# Altium PCB Base.PcbDoc (part 1 of 2)
Units mm, origin at the board's own origin, x right, y up, seen from the top; angles counter-clockwise.
Board outline 100 x 100 mm, 4 copper layers (Top Layer, Layer 1, Layer 2, Bottom Layer), stack 1.56 mm thick; 130 components, 105 nets, 399 pads, 222 vias.
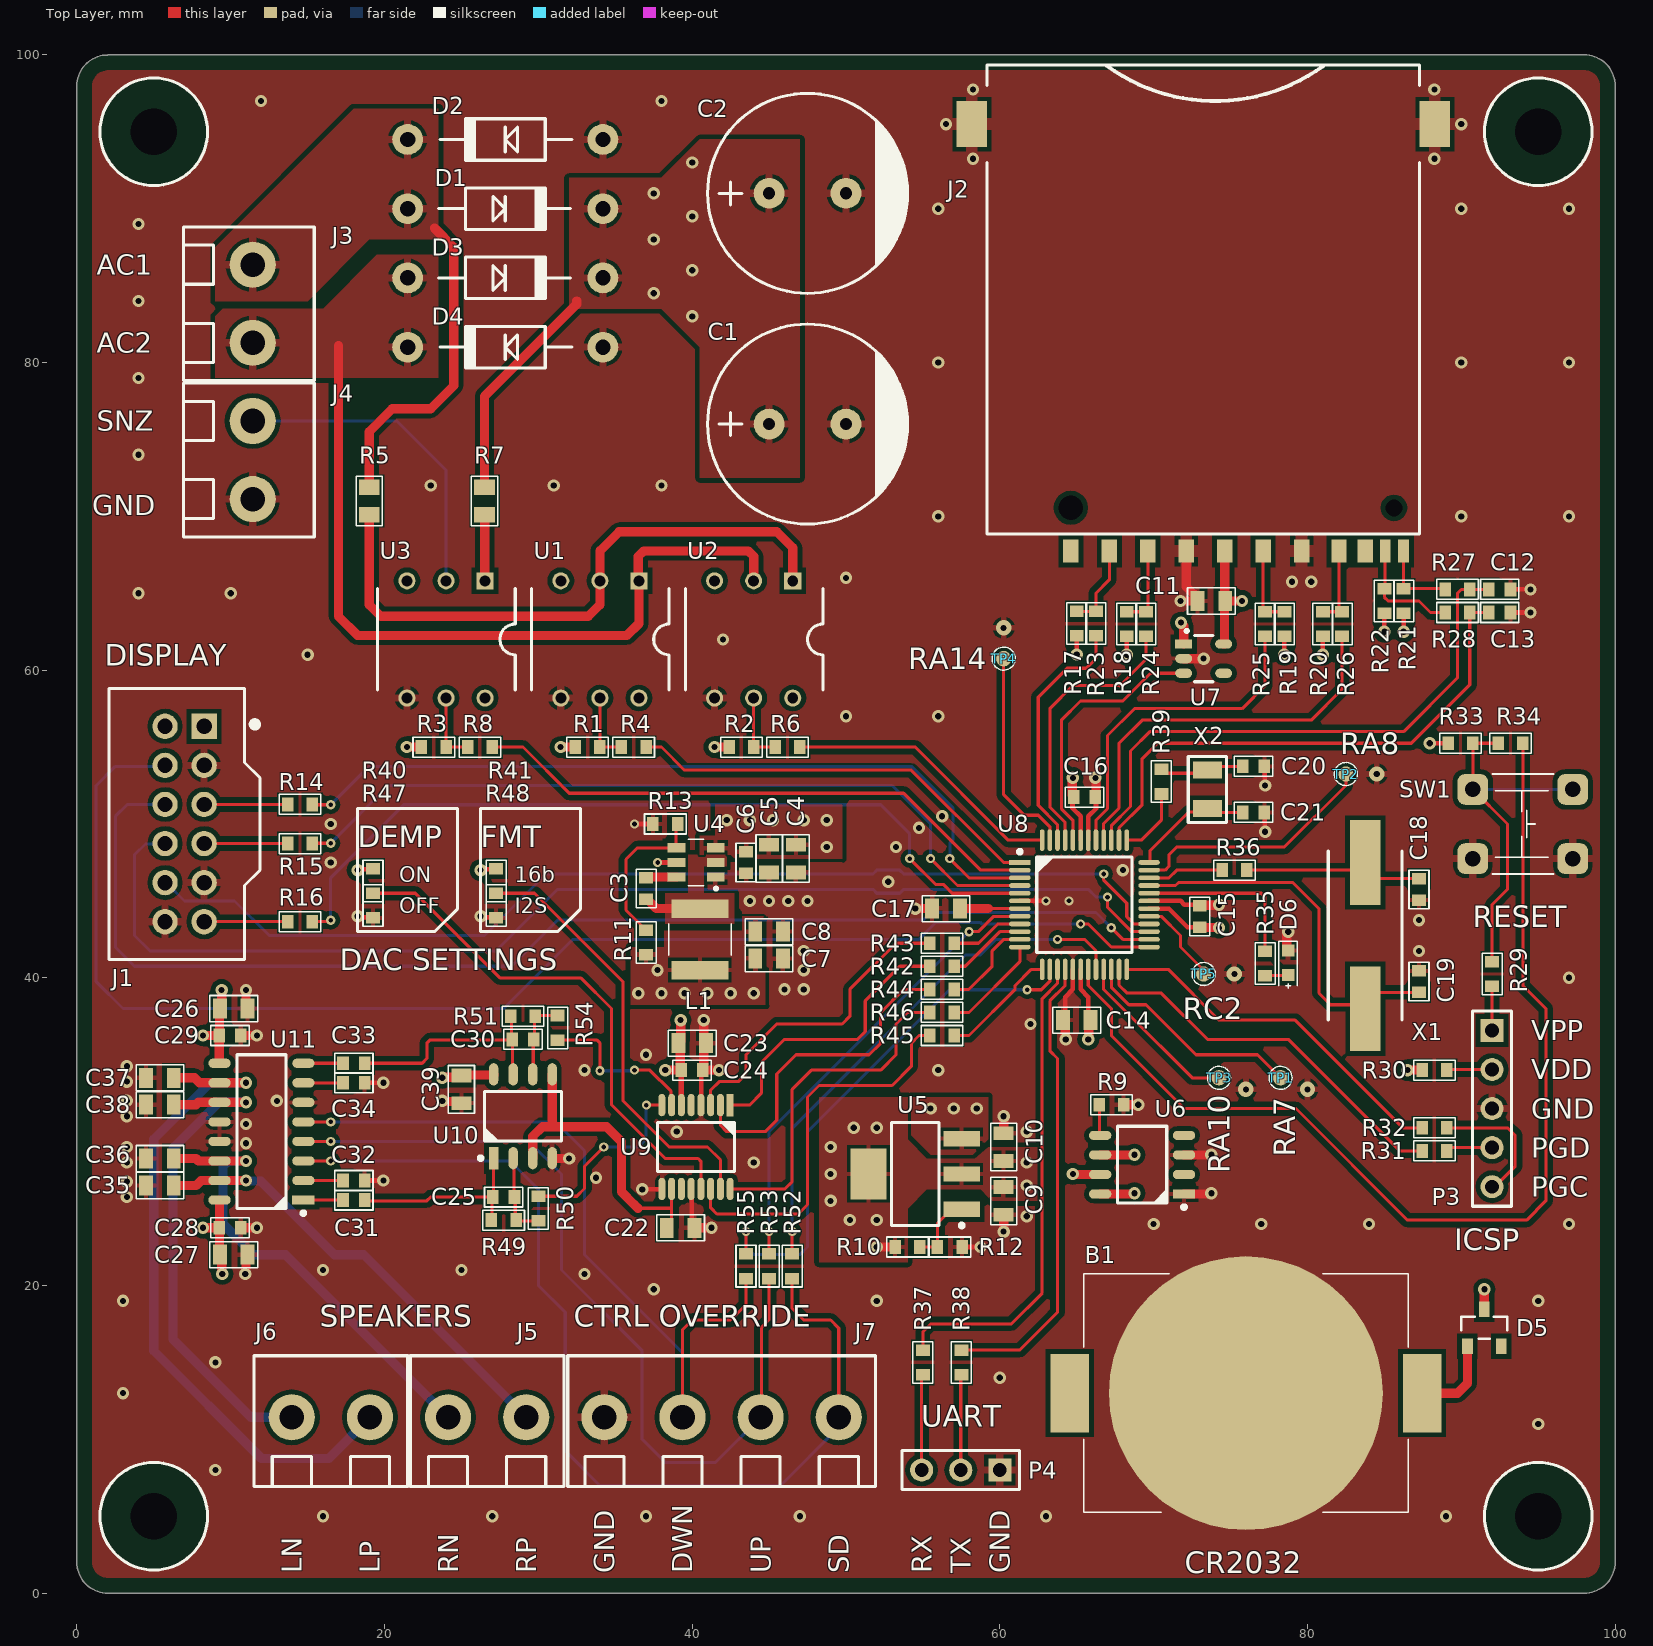
[diagram p0: Top Layer view]
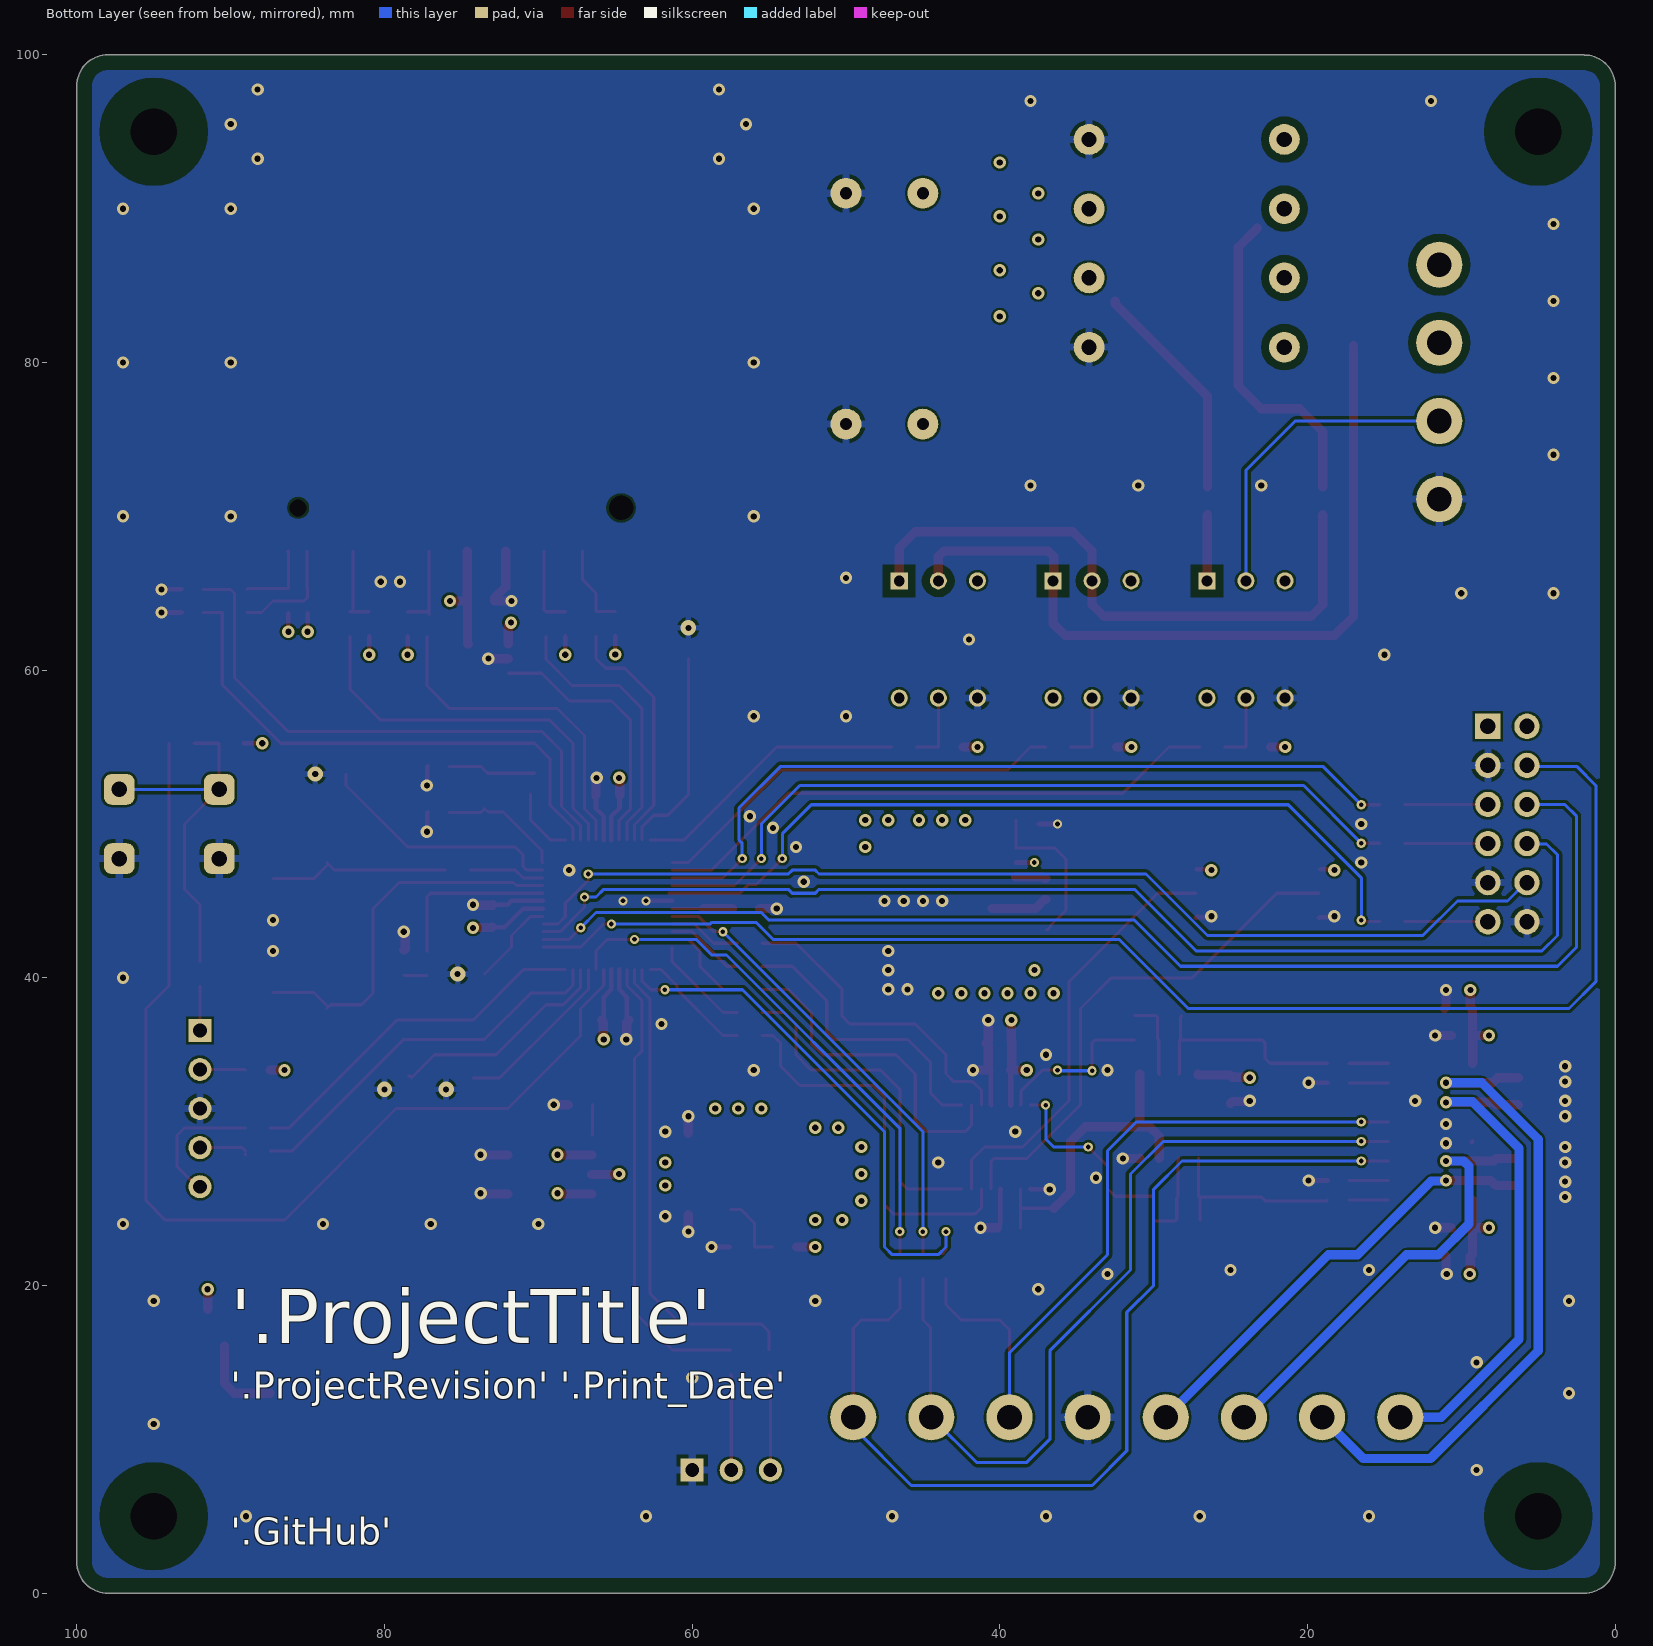
[diagram p1: Bottom Layer view, seen from below]
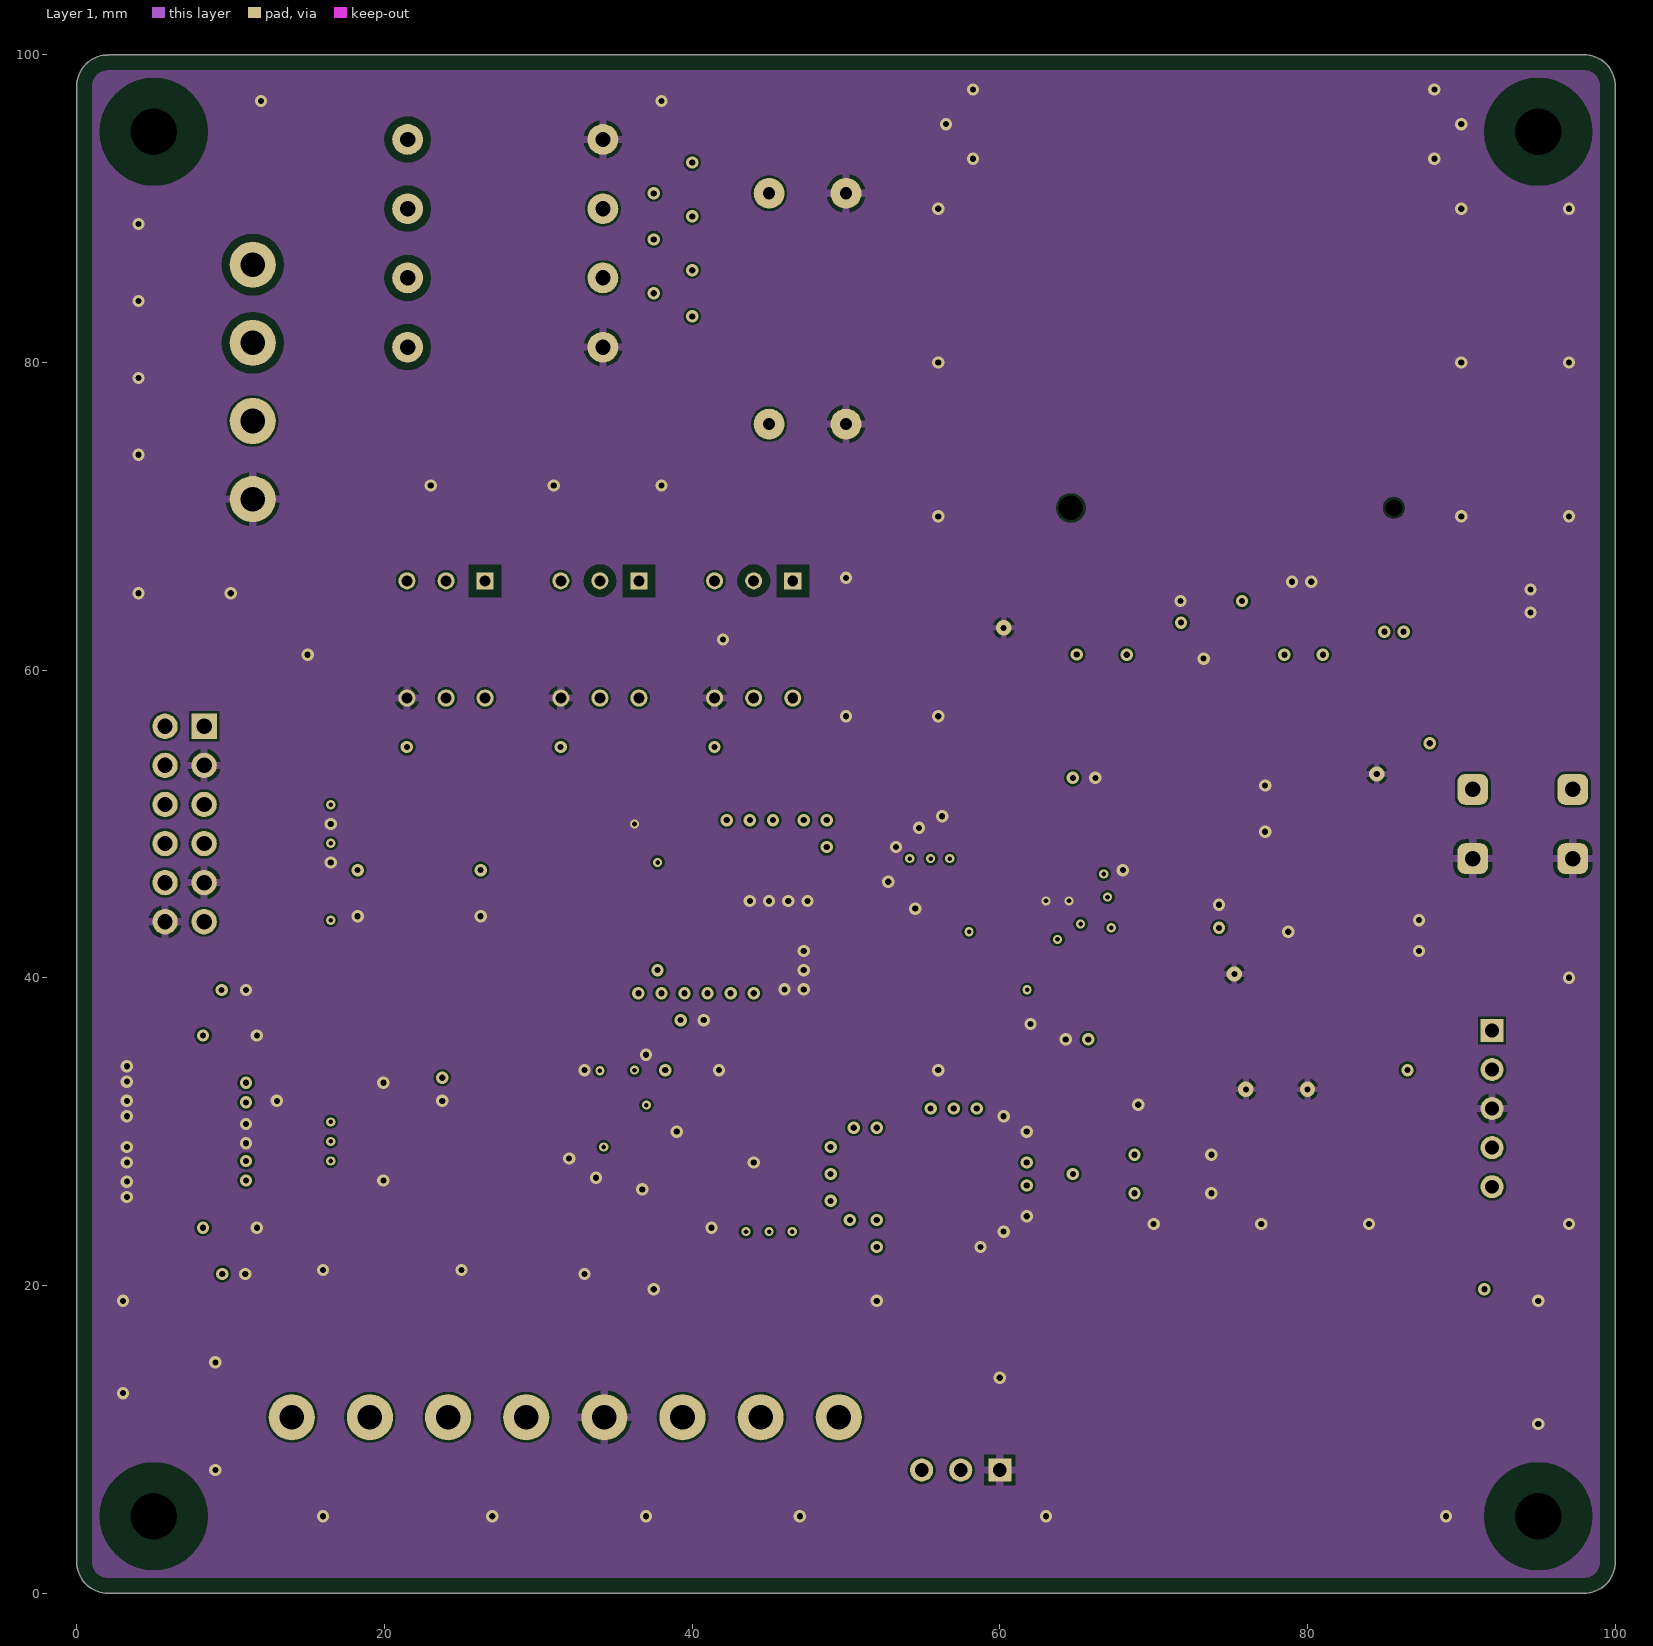
[diagram p2: Layer 1]
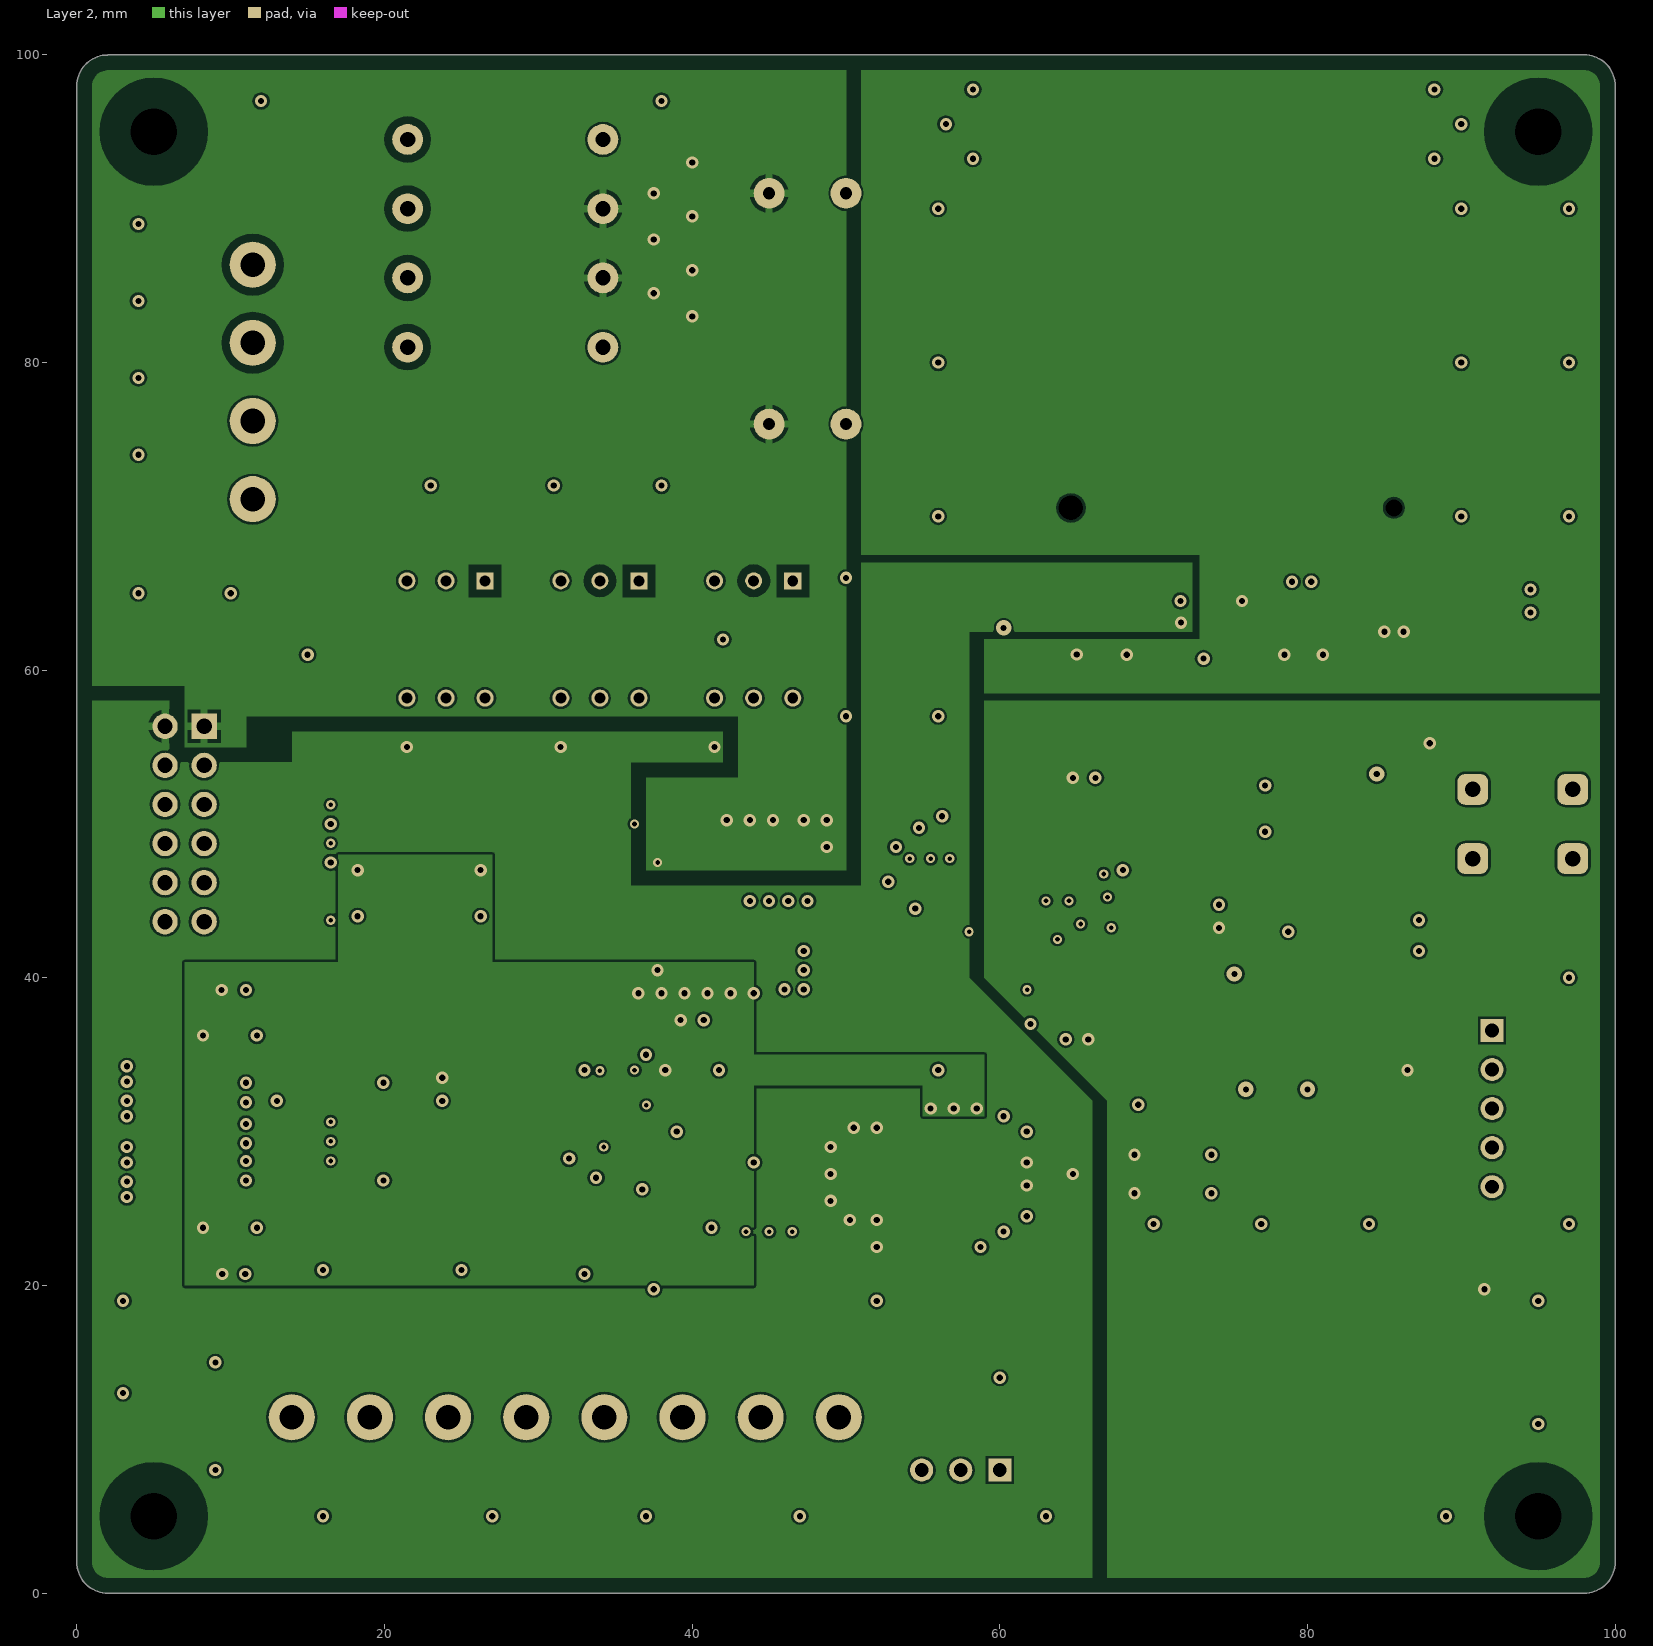
[diagram p3: Layer 2]
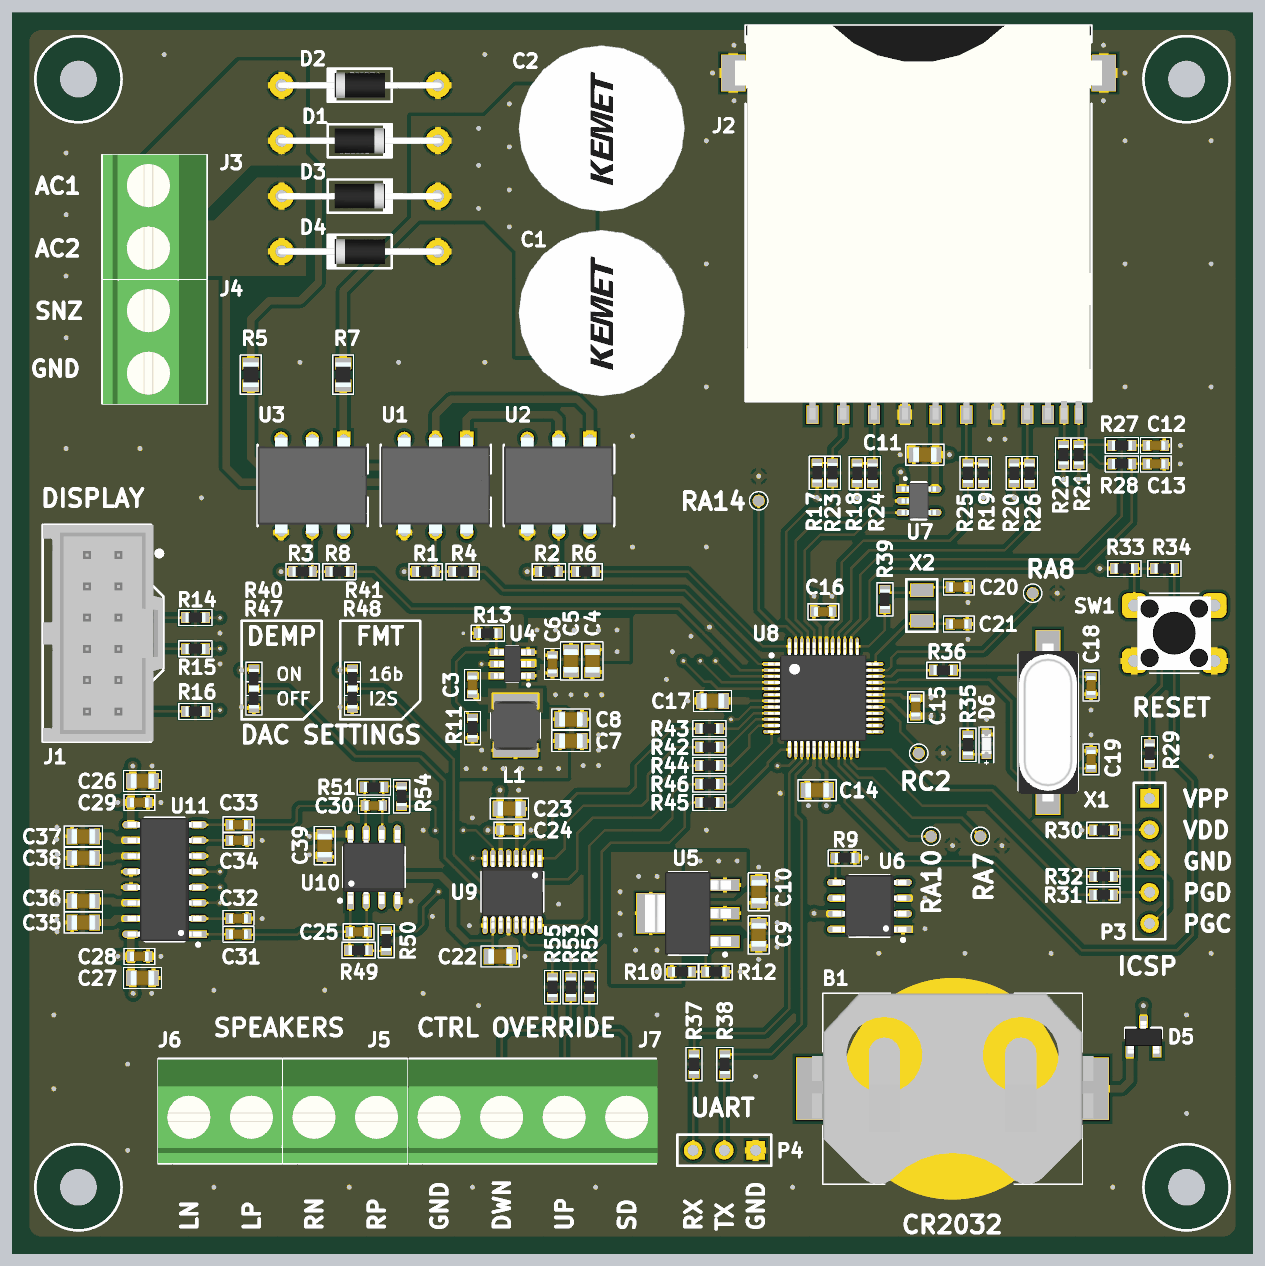
[diagram p5: 3D render of the assembled board from above, using the file's embedded part models]

## Layer stack, top to bottom
Top Solder: solder mask 0.0102, Solder Resist, Dk 3.5
Top Layer: signal copper 0.035
Dielectric 2: prepreg 0.11, PP-006, Dk 4.1
Layer 1: signal copper 0.035
Dielectric 1: dielectric 1.2, FR-4, Dk 4.8
Layer 2: signal copper 0.035
Dielectric 3: prepreg 0.11, PP-006, Dk 4.1
Bottom Layer: signal copper 0.035
Bottom Solder: solder mask 0.0102, Solder Resist, Dk 3.5

## Board outline
0,2 0,97.99 cw(c2,97.99) 2,99.99 2,100 98,100 cw(c98,98) 100,98 100,2 cw(c98,2) 98,0 2,0 cw(c2,2)

## Design rules (kind name [scope] priority, off if disabled: settings)
BoardOutlineClearance [All] p1: gap=0.254 ignorepadtopadclearanceinfootprint=FALSE except(0: Arc-SplitContinuation Track-SplitContinuation SMDPad-SplitContinuation THPad-SplitContinuation Via-SplitContinuation Fill-SplitContinuation Region-SplitContinuation Text-SplitContinuation; 1: Poly-OutlineEdge Poly-CavityEdge Poly-CutoutEdge Poly-SplitBarrior Poly-SplitContinuation)
Clearance "MOUNTING HOLES" [(InNamedUnion('Mounting Holes'))] p1: gap=2 ignorepadtopadclearanceinfootprint=FALSE
Clearance "POLY GND TOP" [(InNamedPolygon('GND Top'))] p2: gap=0.152 ignorepadtopadclearanceinfootprint=FALSE except(0.3: Arc-Fill Arc-Poly Arc-Region Track-Fill Track-Poly Track-Region SMDPad-Fill SMDPad-Poly SMDPad-Region THPad-Fill THPad-Poly THPad-Region Via-Fill Via-Poly Via-Region Fill-Fill Fill-Poly Fill-Region Poly-Poly Poly-Region Region-Region)
Clearance AC [InNet('AC1') or InNet('AC2') or InNet('NetR5_1') or InNet('NetR7_1')] p3: gap=0.5 ignorepadtopadclearanceinfootprint=FALSE
Clearance [All] p4: gap=0.152 ignorepadtopadclearanceinfootprint=FALSE
ComponentClearance [All] p1 off: gap=0.254 collisioncheckmode=3 verticalgap=0 showdistances=FALSE
Height [All] p1: minheight=0 maxheight=50 prefheight=12.7
HoleSize [All] p1: absolutevalues=TRUE maxlimit=6.5 minlimit=0.2 maxpercent=80.000 minpercent=20.000
HoleToHoleClearance [All] p1: gap=0.406 allowstackedmicrovias=TRUE
MinimumSolderMaskSliver [All] p1: minsoldermaskwidth=0.1
PasteMaskExpansion [All] p1: expansion=-0.05
PlaneClearance PlaneClearance_TOP [All] p1: clearance=1
PlaneClearance [All] p2: clearance=0.508
PlaneConnect [All] p1: planeconnectstyle=Direct reliefexpansion=0.508 reliefentries=4 reliefconductorwidth=0.254 reliefairgap=0.254
PolygonConnect PolygonConnect_CR2032 [HasFootprint('BATHLD001-CR2032')] p1: connectstyle=Direct reliefconductorwidth=0.254 reliefentries=4 polygonreliefangle="90 Angle" airgapwidth=0.254
PolygonConnect PolygonConnect_SD [HasFootprint('SD 3M SD-RSMT-2-MQ-WF') vs InNet('GND')] p2: connectstyle=Relief reliefconductorwidth=0.8 reliefentries=4 polygonreliefangle="90 Angle" airgapwidth=0.254
PolygonConnect PolygonConnect_Direct [InNet('SW')] p3: connectstyle=Direct reliefconductorwidth=0.254 reliefentries=4 polygonreliefangle="90 Angle" airgapwidth=0.254
PolygonConnect [All] p4: thpad.connectstyle=Relief thpad.reliefconductorwidth=0.5 thpad.reliefentries=4 thpad.polygonreliefangle="90 Angle" thpad.airgapwidth=0.254 smdpad.connectstyle=Relief smdpad.reliefconductorwidth=0.3 smdpad.reliefentries=4 smdpad.polygonreliefangle="90 Angle" smdpad.airgapwidth=0.2 via.connectstyle=Direct via.reliefconductorwidth=0.254 via.reliefentries=4 via.polygonreliefangle="90 Angle" via.airgapwidth=0.254
RoutingVias [All] p1: holewidth=0.3 width=0.6 viastyle="Through Hole" minholewidth=0.2 minwidth=0.4 maxholewidth=2 maxwidth=6
SilkToSilkClearance [All] p1: silktosilkclearance=0
SilkToSolderMaskClearance [IsPad] p1: minsilkscreentomaskgap=0.01 clearancetoexposedcopper=TRUE
SolderMaskExpansion [All] p1: expansion=0.1 istentingtop=FALSE
Width [All] p1: maxlimit=1.27 minlimit=0.152 preferedwidth=0.254
20 further rules are at their usual default settings.

## Components (designator, comment, footprint, x,y, rotation, side; value= is the part's Value field where it differs from the comment)
B1 "BAT-HLD-001" BATHLD001-CR2032 76,13 r0 top locked
C1 "ESK228M025AL4AA" CAPPRD500W60D1300H2700 45,76 r0 top locked value=2200u
C2 "ESK228M025AL4AA" CAPPRD500W60D1300H2700 45,91 r0 top locked value=2200u
C3 "C0603C104M4RAC" CAP-0603 37,45.8 r90 top value=100n
C4 "CL21A106KAYNNN" CAP-0805 46.75,47.75 r270 top value=10u
C5 "CL21A106KAYNNN" CAP-0805 45,47.75 r270 top value=10u
C6 "C0603C104M4RAC" CAP-0603 43.5,47.5 r270 top value=100n
C7 "CL21A106KAYNNN" CAP-0805 45,41.25 r0 top value=10u
C8 "CL21A106KAYNNN" CAP-0805 45,43 r0 top value=10u
C9 "CL21A106KAYNNN" CAP-0805 60.25,25.5 r270 top value=10u
C10 "CL21A106KAYNNN" CAP-0805 60.25,29 r90 top value=10u
C11 "CL21A106KAYNNN" CAP-0805 73.75,64.5 r180 top value=10u
C12 "C0603C104M4RAC" CAP-0603 92.5,65.25 r180 top value=100n
C13 "C0603C104M4RAC" CAP-0603 92.5,63.75 r180 top value=100n
C14 "CL21A106KAYNNN" CAP-0805 65,37.25 r180 top value=10u
C15 "C0603C104M4RAC" CAP-0603 73,44 r270 top value=100n
C16 "C0603C104M4RAC" CAP-0603 65.5,51.75 r180 top value=100n
C17 "CL21A106KAYNNN" CAP-0805 56.5,44.5 r180 top value=10u
C18 "C0603C270J5GACTU" CAP-0603 87.25,45.75 r270 top value=27p
C19 "C0603C270J5GACTU" CAP-0603 87.25,39.75 r90 top value=27p
C20 "CC0603JRNPO9BN8R2" CAP-0603 76.5,53.75 r0 top value=8.2p
C21 "CC0603JRNPO9BN8R2" CAP-0603 76.5,50.75 r0 top value=8.2p
C22 "CL21A106KAYNNN" CAP-0805 39.25,23.75 r0 top value=10u
C23 "CL21A106KAYNNN" CAP-0805 40,35.75 r0 top value=10u
C24 "C0603C104M4RAC" CAP-0603 40,34 r180 top value=100n
C25 "GRM1885C1H152JA01J" CAP-0603 27.75,25.75 r180 top value=1n5
C26 "CL21A106KAYNNN" CAP-0805 10.2,38 r0 top value=10u
C27 "CL21A106KAYNNN" CAP-0805 10.2,22 r0 top value=10u
C28 "C0603C104M4RAC" CAP-0603 9.95,23.75 r180 top value=100n
C29 "C0603C104M4RAC" CAP-0603 9.95,36.25 r180 top value=100n
C30 "GRM1885C1H152JA01J" CAP-0603 29,36 r180 top value=1n5
C31 "C0603C104M4RAC" CAP-0603 18,25.555 r180 top value=100n
C32 "C0603C104M4RAC" CAP-0603 18,26.825 r180 top value=100n
C33 "C0603C104M4RAC" CAP-0603 18,34.445 r180 top value=100n
C34 "C0603C104M4RAC" CAP-0603 18,33.175 r180 top value=100n
C35 "885012007083" CAP-0805 5.4,26.5 r0 top value=150p
C36 "885012007083" CAP-0805 5.4,28.25 r0 top value=150p
C37 "885012007083" CAP-0805 5.4,33.5 r0 top value=150p
C38 "885012007083" CAP-0805 5.4,31.75 r0 top value=150p
C39 "CL21A106KAYNNN" CAP-0805 25,32.75 r270 top value=10u
D1 "1N4004" DIODE-DO41 27.85,90 r0 top
D2 "1N4004" DIODE-DO41 27.85,94.5 r180 top
D3 "1N4004" DIODE-DO41 27.85,85.5 r0 top
D4 "1N4004" DIODE-DO41 27.85,81 r180 top
D5 "BAS20LT3G" SOT95P240X110-3N 91.5,17.25 r90 top
D6 "150060VS75000" LED-SMD-0603-1.6X0.8 78.748,40.977 r270 top value=Green
J1 "90130-1112" SHDR12W65P254_2X6_1758X975X1110P 7,50 r270 top locked
J2 "SD-RSMT-2-MQ-WF" "SD 3M SD-RSMT-2-MQ-WF" 74,94 r180 top locked
J3 "SCREW-TH-BLOCK-200-2" SCREW-TH-BLOCK-200-2 11.43,83.82 r270 top locked
J4 "SCREW-TH-BLOCK-200-2" SCREW-TH-BLOCK-200-2 11.43,73.66 r270 top locked
J5 "SCREW-TH-BLOCK-200-2" SCREW-TH-BLOCK-200-2 26.67,11.43 r0 top locked
J6 "SCREW-TH-BLOCK-200-2" SCREW-TH-BLOCK-200-2 16.51,11.43 r0 top locked
J7 "SCREW-TH-BLOCK-200-4" SCREW-TH-BLOCK-200-4 41.91,11.43 r0 top locked
L1 "NRS4018T3R3MDGJ" INDP4040X18M 40.5,42.5 r270 top value=3u3
P3 "ICSP" HDR1X5 92,36.58 r270 top
P4 "UART" HDR1X3 60,8 r180 top locked
R1 "RC0603FR-074K7L" RES-0603 33.2,55 r180 top value=4K7
R2 "RC0603FR-074K7L" RES-0603 43.2,55 r180 top value=4K7
R3 "RC0603FR-074K7L" RES-0603 23.2,55 r180 top value=4K7
R4 "RC0603FR-074K7L" RES-0603 36.2,55 r180 top value=4K7
R5 "RC0805FR-071KL" RES-0805 19,71 r90 top value=1K
R6 "RC0603FR-074K7L" RES-0603 46.2,55 r180 top value=4K7
R7 "RC0805FR-071KL" RES-0805 26.5,71 r90 top value=1K
R8 "RC0603FR-074K7L" RES-0603 26.2,55 r180 top value=4K7
R9 "RC0603FR-07470RL" RES-0603 67.25,31.75 r0 top value=470R
R10 "RC0603FR-071KL" RES-0603 53.996,22.5 r180 top value=1K
R11 "RC0603FR-0754K9L" RES-0603 37,42.3 r270 top value=54K9
R12 "RC0603FR-071K6L" RES-0603 56.746,22.5 r180 top value=1K6
R13 "RC0603FR-0710KL" RES-0603 38.25,50 r0 top value=10K
R14 "RC0603FR-07100RL" RES-0603 14.5,51.27 r180 top value=100R
R15 "RC0603FR-07100RL" RES-0603 14.5,48.73 r180 top value=100R
R16 "RC0603FR-07100RL" RES-0603 14.5,43.65 r180 top value=100R
R17 "RC0603FR-0747KL" RES-0603 65,63.025 r270 top value=47K
R18 "RC0603FR-0747KL" RES-0603 68.25,63 r270 top value=47K
R19 "RC0603FR-0747KL" RES-0603 78.5,63 r270 top value=47K
R20 "RC0603FR-0747KL" RES-0603 81,63 r270 top value=47K
R21 "RC0603FR-0747KL" RES-0603 86.25,64.5 r270 top value=47K
R22 "RC0603FR-0747KL" RES-0603 85,64.5 r270 top value=47K
R23 "RC0603FR-07100RL" RES-0603 66.25,63.025 r90 top value=100R
R24 "RC0603FR-07100RL" RES-0603 69.5,63 r90 top value=100R
R25 "RC0603FR-07100RL" RES-0603 77.25,63 r90 top value=100R
R26 "RC0603FR-07100RL" RES-0603 82.25,63 r90 top value=100R
R27 "RC0603FR-0747KL" RES-0603 89.75,65.25 r180 top value=47K
R28 "RC0603FR-0747KL" RES-0603 89.75,63.75 r180 top value=47K
R29 "RC0603FR-07100RL" RES-0603 92,40.25 r90 top value=100R
R30 "RC0603FR-07100RL" RES-0603 88.25,34 r180 top value=100R
R31 "RC0603FR-07100RL" RES-0603 88.25,28.75 r180 top value=100R
R32 "RC0603FR-07100RL" RES-0603 88.25,30.25 r180 top value=100R
R33 "RC0603FR-0747KL" RES-0603 89.95,55.25 r180 top value=47K
R34 "RC0603FR-07100RL" RES-0603 93.2,55.25 r0 top value=100R
R35 "RC0603FR-071KL" RES-0603 77.248,40.927 r270 top value=1K
R36 "RC0603FR-07100RL" RES-0603 75.25,47 r180 top value=100R
R37 "RC0603FR-07100RL" RES-0603 55,15 r270 top value=100R
R38 "RC0603FR-07100RL" RES-0603 57.5,15 r270 top value=100R
R39 "RC0603FR-07100RL" RES-0603 70.5,52.75 r270 top value=100R
R40 "RC0603FR-07100RL" RES-0603 19.25,46.3 r90 top value=100R
R41 "RC0603FR-07100RL" RES-0603 27.25,46.3 r90 top value=100R
R42 "RC0603FR-07100RL" RES-0603 56.25,40.75 r180 top value=100R
R43 "RC0603FR-07100RL" RES-0603 56.25,42.25 r180 top value=100R
R44 "RC0603FR-07100RL" RES-0603 56.25,39.25 r180 top value=100R
R45 "RC0603FR-07100RL" RES-0603 56.25,36.25 r180 top value=100R
R46 "RC0603FR-07100RL" RES-0603 56.25,37.75 r180 top value=100R
R47 "RC0603FR-07100RL" RES-0603 19.25,44.7 r90 top value=100R
R48 "RC0603FR-07100RL" RES-0603 27.25,44.7 r90 top value=100R
R49 "RC0603FR-074K7L" RES-0603 27.75,24.25 r180 top value=4K7
R50 "RC0603FR-0747KL" RES-0603 30,25 r90 top value=47K
R51 "RC0603FR-074K7L" RES-0603 29,37.5 r180 top value=4K7
R52 "RC0603FR-07100RL" RES-0603 46.5,21.25 r270 top value=100R
R53 "RC0603FR-07100RL" RES-0603 45,21.25 r270 top value=100R
R54 "RC0603FR-0747KL" RES-0603 31.25,36.75 r270 top value=47K
R55 "RC0603FR-07100RL" RES-0603 43.5,21.25 r270 top value=100R
SW1 "Push Button 6mm TH" "Push Button 6mm TH" 94,50 r180 top
TP1 "RA7" TESTPOINT-1mm 78.25,33.5 r0 top
TP2 "RA8" TESTPOINT-1mm 82.5,53.25 r90 top
TP3 "RA10" TESTPOINT-1mm 74.25,33.5 r90 top
TP4 "RA14" TESTPOINT-1mm 60.25,60.75 r90 top
TP5 "RC2" TESTPOINT-1mm 73.25,40.25 r90 top
U1 "H11A1" DIP762W51P254L889H508Q6N 34,62 r270 top locked
U2 "H11A1" DIP762W51P254L889H508Q6N 44,62 r270 top locked
U3 "H11A1" DIP762W51P254L889H508Q6N 24,62 r270 top locked
U4 "TPS561201DDC" SOT95P278X110-6N 40.25,47.5 r180 top
U5 "AZ1117IH-ADJTRG1" SOT230P700X180-4M 54.496,27.25 r180 top
U6 "MIC2548A-2YM" SOIC127P600X175-8N 69.25,27.85 r180 top
U7 "MIC2004-0.5" SOT23-5 73.25,60.75 r0 top
U8 "PIC24FJ64GA705-I/PT" TSQFP50P900X900X120-48N 65.5,44.75 r0 top
U9 "PCM1754" SOP64P600X175-16N 40.25,29 r270 top
U10 "LMV358IDR" SOIC127P600X175-8N 29,31 r90 top
U11 "PAM8407" SOIC127P600X175-16N 12,30 r180 top
X1 "LFXTAL017619Bulk" XTAL1140X490X430_HC49 83.75,42.75 r90 top value="7.168 MHz"
X2 "ECS-.327-6-34B-TR" "XTAL-ECS-3.2 mm x 1.5 mm" 73.5,52.25 r90 top value="32.768 KHz"

## Footprints (in the part's own frame and the unit in brackets; to place one, negate y for a bottom-side part, rotate by r counter-clockwise, add the part's x,y. Pads: shape width x height; smd on the part's side, far side on the other; paste and mask are expansions set on the pad)
BATHLD001-CR2032 [mm] "Linx CR2032 Battery Holder"
  rect 2.5x5.1 smd: 1(-11.45,0) 1(11.45,0)
  round 17.8 smd paste-10: 2(0,0)
  silkscreen extent -10.55,-7.75 10.55,7.75, body extent -11.43,-7.75 11.43,7.75, height 4.31
CAP-0603 [mm]
  rect 0.75x0.9 smd: 1(-0.7,0) 2(0.7,0)
  silkscreen extent -1.25,-0.65 1.25,0.65, body extent -0.8,-0.4 0.8,0.4, height 0.95
CAP-0805 [mm]
  rect 0.9x1.3 smd: 1(-0.9,0) 2(0.9,0)
  silkscreen extent -1.55,-0.85 1.55,0.85, body extent -1,-0.63 1,0.63, height 1.35
CAPPRD500W60D1300H2700 [mm]
  round 2 hole 0.8: 1(0,0) 2(5,0)
  silkscreen extent -4,-6.5 9,6.5, body extent -4.25,-6.75 9.25,6.75, height 27.2
DIODE-DO41 [mm]
  round 2 hole 1: A(-6.35,0) K(6.35,0)
  silkscreen extent -4.35,-1.35 4.25,1.35, body extent -6.7,-1.02 6.7,1.02, height 3.03
DIP762W51P254L889H508Q6N [mm]
  rect 1.11x1.11 hole 0.71: 1(-3.81,2.54)
  round 1.11 hole 0.71: 2(-3.81,0) 3(-3.81,-2.54) 4(3.81,-2.54) 5(3.81,0) 6(3.81,2.54)
  silkscreen extent -3.3,-4.45 3.3,4.5, body extent -3.94,-4.45 3.94,4.45, height 5.08
HDR1X3 [mm] "Connector; Header; 3 Position"
  rect 1.5x1.5 hole 0.9: 1(0,0)
  round 1.5 hole 0.9: 2(2.54,0) 3(5.08,0)
  silkscreen extent -1.27,-1.27 6.35,1.27
HDR1X5 [mm] "Connector; Header; 5 Position"
  rect 1.5x1.5 hole 0.9: 1(0,0)
  round 1.5 hole 0.9: 2(2.54,0) 3(5.08,0) 4(7.62,0) 5(10.16,0)
  silkscreen extent -1.27,-1.27 11.43,1.27
INDP4040X18M [mm] "Precision Wire Wound Inductor, 2-Leads, Body 4.00x4.00mm, IPC Low Density"
  rect 1.2x3.7 smd: 1(-2,0) 2(2,0)
  silkscreen extent -1.02,-2.03 1.02,2.03, body extent -2,-2 2,2, height 1.8
LED-SMD-0603-1.6X0.8 [mm]
  rect 0.8x0.8 smd: A(0.8,0) K(-0.8,0)
  silkscreen extent -1.4,-0.6 1.65,0.6, body extent -0.83,-0.4 0.77,0.4, height 0.7
"Push Button 6mm TH" [mm]
  rrect50% 2x2 hole 1: 1(-3.25,2.25) 1(3.25,2.25) 2(-3.25,-2.25) 2(3.25,-2.25)
  silkscreen extent -2,-3.25 2,3.25, body extent -3,-3 3,3, height 4.5
RES-0603 [mm]
  rect 0.75x0.9 smd: 1(-0.8,0) 2(0.8,0)
  silkscreen extent -1.35,-0.65 1.35,0.65, body extent -0.8,-0.4 0.8,0.4, height 0.55
RES-0805 [mm]
  rect 1x1.35 smd: 1(-0.9,0) 2(0.9,0)
  silkscreen extent -1.6,-0.85 1.6,0.85, body extent -1,-0.62 1,0.63, height 0.6
SCREW-TH-BLOCK-200-2 [mm]
  round 3 hole 1.6: 1(-2.54,0) 2(2.54,0)
  silkscreen extent -5,-4.5 5,4, body extent -5.04,-4.44 5.04,3.96, height 10
SCREW-TH-BLOCK-200-4 [mm]
  round 3 hole 1.6: 1(-7.62,0) 2(-2.54,0) 3(2.54,0) 4(7.62,0)
  silkscreen extent -10,-4.5 10,4, body extent -10.12,-4.44 10.12,3.96, height 10
"SD 3M SD-RSMT-2-MQ-WF" [mm]
  rect 1x1.5 smd: 1(6.88,26.25) 2(4.38,26.25) 3(1.88,26.25) 4(-0.62,26.25) 5(-3.12,26.25) 6(-5.62,26.25) 7(-8.05,26.25) 8(-9.75,26.25) 9(9.38,26.25)
  rect 0.7x1.5 smd: 10(-11.05,26.25) 11(-12.25,26.25)
  round 0 hole 1.1 unplated: 13(-11.62,23.45)
  round 0 hole 1.6 unplated: 13(9.38,23.45)
  rect 2x3 smd: MP(-14.28,-1.5) MP(15.82,-1.5)
  silkscreen extent -13.28,-5.35 14.82,25.15, body extent -14.13,-5.35 15.67,26.65, height 3.1
SHDR12W65P254_2X6_1758X975X1110P [mm]
  rect 1.65x1.65 hole 1: 1(-6.35,1.27)
  round 1.65 hole 1: 2(-6.35,-1.27) 3(-3.81,1.27) 4(-3.81,-1.27) 5(-1.27,1.27) 6(-1.27,-1.27) 7(1.27,1.27) 8(1.27,-1.27) 9(3.81,1.27) 10(3.81,-1.27) 11(6.35,1.27) 12(6.35,-1.27)
  silkscreen extent -8.8,-4.9 8.8,4.9, body extent -8.78,-4.89 8.8,4.86, height 10.8
SOIC127P600X175-8N [mm] "SOIC, 8-Leads, Body 4.90x3.90mm, Pitch 1.27mm, IPC Medium Density"
  rect 1.45x0.6 smd: 1(-2.725,1.905)
  oval 1.45x0.6 smd: 2(-2.725,0.635) 3(-2.725,-0.635) 4(-2.725,-1.905) 5(2.725,-1.905) 6(2.725,-0.635) 7(2.725,0.635) 8(2.725,1.905)
  silkscreen extent -2.85,-2.5 1.6,2.88, body extent -3,-2.5 3,2.5, height 1.75
SOIC127P600X175-16N [mm] "SOIC, 16-Leads, Body 9.90x3.90mm, Pitch 1.27mm, IPC Medium Density"
  rect 1.45x0.6 smd: 1(-2.725,4.445)
  oval 1.45x0.6 smd: 2(-2.725,3.175) 3(-2.725,1.905) 4(-2.725,0.635) 5(-2.725,-0.635) 6(-2.725,-1.905) 7(-2.725,-3.175) 8(-2.725,-4.445) 9(2.725,-4.445) 10(2.725,-3.175) 11(2.725,-1.905) 12(2.725,-0.635) 13(2.725,0.635) 14(2.725,1.905) 15(2.725,3.175) 16(2.725,4.445)
  silkscreen extent -2.85,-5 1.6,5.42, body extent -3,-5 3,5, height 1.75
SOP64P600X175-16N [mm] "SOP, 16-Leads, Body 4.91x3.90mm, Pitch 0.64mm, IPC Medium Density"
  rect 1.45x0.45 smd: 1(-2.725,2.222)
  oval 1.45x0.45 smd: 2(-2.725,1.587) 3(-2.725,0.952) 4(-2.725,0.317) 5(-2.725,-0.318) 6(-2.725,-0.953) 7(-2.725,-1.588) 8(-2.725,-2.223) 9(2.725,-2.222) 10(2.725,-1.587) 11(2.725,-0.952) 12(2.725,-0.317) 13(2.725,0.318) 14(2.725,0.953) 15(2.725,1.588) 16(2.725,2.223)
  silkscreen extent -1.65,-2.5 1.6,2.54, body extent -3,-2.5 3,2.5, height 1.75
SOT23-5 [mm]
  rect 1.1x0.6 smd: 1(-1.3,0.95)
  oval 1.1x0.6 smd: 2(-1.3,0) 3(-1.3,-0.95) 4(1.3,-0.95) 5(1.3,0.95)
  silkscreen extent -1.2,-1.5 0.6,1.9, body extent -1.4,-1.45 1.4,1.45, height 1.45
SOT95P240X110-3N [mm]
  rect 1x0.7 smd: 1(-1.2,1.1) 2(-1.2,-1.1) 3(1.2,0)
  silkscreen extent -0.71,-1.5 0.71,1.5, body extent -1.39,-1.5 1.26,1.5, height 1.1
SOT95P278X110-6N [mm] "SOT23, 6-Leads, Body 2.90x2.78mm, Pitch 0.95mm, IPC Medium Density"
  rect 1.15x0.6 smd: 1(-1.275,0.95) 2(-1.275,0) 3(-1.275,-0.95) 4(1.275,-0.95) 5(1.275,0) 6(1.275,0.95)
  silkscreen extent -1.4,-1.5 0.5,1.8, body extent -1.5,-1.5 1.5,1.5, height 1.1
SOT230P700X180-4M [mm] "SOT223, 4-Leads, Body 6.50x7.00mm (avg), Pitch 2.30mm, IPC Low Density"
  rect 2.35x1 smd: 1(-3.025,2.3) 2(-3.025,0) 3(-3.025,-2.3)
  rect 2.35x3.3 smd: 2(3.025,0)
  silkscreen extent -3.15,-3.35 1.55,3.47, body extent -3.5,-3.35 3.5,3.35, height 1.8
TESTPOINT-1mm [mm]
  round 1 smd: 1(0,0)
  silkscreen extent -0.75,-0.75 0.75,0.75
TSQFP50P900X900X120-48N [mm] "TSQFP, 48-Leads, Body 7.00x7.00mm, Pitch 0.50mm, IPC Medium Density"
  rect 1.4x0.3 smd: 1(-4.2,2.75)
  oval 1.4x0.3 smd: 2(-4.2,2.25) 3(-4.2,1.75) 4(-4.2,1.25) 5(-4.2,0.75) 6(-4.2,0.25) 7(-4.2,-0.25) 8(-4.2,-0.75) 9(-4.2,-1.25) 10(-4.2,-1.75) 11(-4.2,-2.25) 12(-4.2,-2.75) 25(4.2,-2.75) 26(4.2,-2.25) 27(4.2,-1.75) 28(4.2,-1.25) 29(4.2,-0.75) 30(4.2,-0.25) 31(4.2,0.25) 32(4.2,0.75) 33(4.2,1.25) 34(4.2,1.75) 35(4.2,2.25) 36(4.2,2.75)
  oval 0.3x1.4 smd: 13(-2.75,-4.2) 14(-2.25,-4.2) 15(-1.75,-4.2) 16(-1.25,-4.2) 17(-0.75,-4.2) 18(-0.25,-4.2) 19(0.25,-4.2) 20(0.75,-4.2) 21(1.25,-4.2) 22(1.75,-4.2) 23(2.25,-4.2) 24(2.75,-4.2) 37(2.75,4.2) 38(2.25,4.2) 39(1.75,4.2) 40(1.25,4.2) 41(0.75,4.2) 42(0.25,4.2) 43(-0.25,4.2) 44(-0.75,4.2) 45(-1.25,4.2) 46(-1.75,4.2) 47(-2.25,4.2) 48(-2.75,4.2)
  silkscreen extent -4.32,-3.1 3.1,3.57, body extent -4.5,-4.5 4.5,4.5, height 1.2
XTAL1140X490X430_HC49 [mm] "Crystal HC49 SMD Body 11.4 x 4.9 x 4.3 mm"
  rect 5.5x2 smd: 1(-4.75,0) 2(4.75,0)
  silkscreen extent -5.5,-2.4 5.5,2.4, body extent -6.4,-2.41 6.4,2.42, height 4.3
"XTAL-ECS-3.2 mm x 1.5 mm" [mm]
  rect 1.1x1.9 smd: 1(-1.25,0) 2(1.25,0)
  silkscreen extent -2.15,-1.25 2.15,1.25, body extent -1.6,-0.7 1.58,0.7, height 3.1

## Part data
B1: library part CR2032-SMD-BAT-HLD-001, "Portabatterie a celle a bottone Linx CR2032 Battery Holder", Supplier Part Number 1=712-BAT-HLD-001, Size=CR2032, Supplier 1=Mouser
C1 C2: library part CAP-RADIAL-2200u-25V-ALU-20%, "ALU 25V 2200uF  RippleCurrent=1.3A 20%", Dielectric=ALU, Manufacturer=KEMET, Supplier Part Number 1=80-ESK228M025AL4AA, Tolerance=20%, Voltage Rating=25V, Supplier 1=Mouser
C3 C6 C12 C13 C15 C16 C24 C28 C29 C31 C32 C33 C34: library part CAP-0603-100n-16V-X7R-20%, "MLCC - SMD 16V 100nF X7R 0603 20%", Dielectric=X7R, Manufacturer=KEMET, Supplier Part Number 1=80-C0603C104M4RAC, Tolerance=20%, Voltage Rating=16V, Supplier 1=Mouser
C4 C5 C7 C8 C9 C10 C11 C14 C17 C22 C23 C26 C27 C39: library part CAP-0805-10u-25V-X5R-10%, "MLCC - SMD 25V 10uF X5R 10%", Dielectric=X5R, Manufacturer=Samsung, Supplier Part Number 1=187-CL21A106KAYNNNE, Tolerance=10%, Voltage Rating=25, Supplier 1=Mouser
C18 C19: library part CAP-0603-27p-50V-NP0-5%, "MLCC - SMD 50V 27pF NP0 0603 5%", Dielectric=NP0, Manufacturer=KEMET, Supplier Part Number 1=80-C0603C270J5G, Tolerance=5%, Voltage Rating=50V, Supplier 1=Mouser
C20 C21: library part CAP-0603-8p2-50V-NP0-5%, "MLCC - SMD 50V 8.2pF NP0 0603 5%", Dielectric=NP0, Manufacturer=YAGEO, Supplier Part Number 1=603-CC603JRNPO9BN8R2, Tolerance=5%, Voltage Rating=50V, Supplier 1=Mouser
C25 C30: library part CAP-0603-1n5-50V-NP0-5%, "MLCC - SMD 50V 1.5nF NP0 0603 5%", Dielectric=NP0, Manufacturer=Murata, Supplier Part Number 1=81-GRM185C1H152JA01J, Tolerance=5%, Voltage Rating=50V, Supplier 1=Mouser
C35 C36 C37 C38: library part CAP-0805-150p-100V-NP0-5%, "MLCC - SMD 100V 150pF NP0 0805 5%", Dielectric=NP0, Manufacturer="Wurth Electronics", Supplier Part Number 1=710-885012007083, Voltage Rating=100V, Supplier 1=Mouser, Tollerance=5%
D1 D2 D3 D4: library part DIODE-1N4004-T, "Silicon Diode - 400V 50uA 1A", Forward Current=1A, Leakage Current=50uA, Reverse Voltage=400V, Supplier Part Number 1=621-1N4004, Supplier 1=Mouser
D5: library part DIODE-BAS20LT3G, "Silicon Diode - 200V 0.1uA 200mA", Forward Current=200mA, Leakage Current=100nA, Reverse Voltage=200V, Supplier Part Number 1=863-BAS20LT3G, Reverse Recovery Time=50nS, Supplier 1=Mouser
D6: library part LED-SMD-0603-Green-150060VS75000, "Standard LEDs - SMD WL-SMCW SMDMono TpVw Waterclr 0603 BrtGrn", Manufacturer="Wurth Elektronik", Supplier Part Number 1=710-150060VS75000, Supplier 1=Mouser
J1: library part HEADER-12x2-2.54-TH-90130-1112, "Terminali e capicorda 2.54MM CGRIDIII HDR 12P V DR SHRD TIN", Manufacturer_Name=Molex, Supplier Part Number 1=538-90130-1112, Datasheet Link=https://www.molex.com/pdm_docs/sd/901301112_sd.pdf, Height=11.1mm, Manufacturer_Part_Number=90130-1112, Supplier 1=Mouser
J2: library part SD-PUSH-PUSH-SD-RSMT-2-MQ-WF, "Connettori per schede di memoria SD CARD CONNECTOR", Supplier Part Number 1=517-SD-RSMT-2-MQ-WF, Supplier 1=Mouser
J3 J4 J5 J6: "Screw Therminal Block 200 mil Pitch 2 Contacts"
J7: "Screw Therminal Block 200 mil Pitch 4 Contacts"
L1: library part IND-4018-3u3-NRS4018T3R3MDGJ, "Fixed Inductor 4018 3.3uH 66mOhms +/-20%Tol 2300mA", Manufacturer="Taiyo Yuden", Max DC Current=2.3A, Max DC Resistance=66m, Supplier Part Number 1=963-NRS4018T3R3MDGJ, Tolerance=20%, Supplier 1=Mouser
P3: library part "Header 5", "Header, 5-Pin", LatestRevisionDate=17-Jul-2002, LatestRevisionNote="Re-released for DXP Platform.", Publisher="Altium Limited"
P4: library part "Header 3", "Header, 3-Pin", LatestRevisionDate=17-Jul-2002, LatestRevisionNote="Re-released for DXP Platform.", Publisher="Altium Limited"
R1 R2 R3 R4 R6 R8 R49 R51: library part RES-0603-4K7-1/10W-1%, "Thick Film - SMD 75V 1/10W 4.7K ohm 0603 1%", Manufacturer=Yageo, Power Rating=1/10W, Supplier Part Number 1=603-RC0603FR-074K7L, Tolerance=1%, Voltage Rating=75V, Supplier 1=Mouser, Supplier 2=Mouser, Supplier 3=Mouser, Supplier Part Number 2=603-RC0603FR-104K7L, Supplier Part Number 3=603-RC0603FR-134K7L
R5 R7: library part RES-0805-1K-1/8W-1%, "Thick Film - SMD 150V 1/8W 1K ohm 0805 1%", Manufacturer=Yageo, Power Rating=1/8W, Supplier Part Number 1=603-RC0805FR-071KL, Tolerance=1%, Voltage Rating=150V, Supplier 1=Mouser, Supplier 2=Mouser, Supplier 3=Mouser, Supplier Part Number 2=603-RC0805FR-101KL, Supplier Part Number 3=603-RC0805FR-131KL
R9: library part RES-0603-470-1/10W-1%, "Thick Film - SMD 75V 1/10W 470 ohm 0603 1%", Manufacturer=Yageo, Power Rating=1/10W, Supplier Part Number 1=603-RC0603FR-07470RL, Tolerance=1%, Voltage Rating=75V, Supplier 1=Mouser, Supplier 2=Mouser, Supplier 3=Mouser, Supplier Part Number 2=603-RC0603FR-10470RL, Supplier Part Number 3=603-RC0603FR-13470RL
R10 R35: library part RES-0603-1K-1/10W-1%, "Thick Film - SMD 75V 1/10W 1K ohm 0603 1%", Manufacturer=Yageo, Power Rating=1/10W, Supplier Part Number 1=603-RC0603FR-071KL, Tolerance=1%, Voltage Rating=75V, Supplier 1=Mouser, Supplier 2=Mouser, Supplier 3=Mouser, Supplier Part Number 2=603-RC0603FR-101KL, Supplier Part Number 3=603-RC0603FR-131KL
R11: library part RES-0603-54K9-1/10W-1%, "Thick Film - SMD 75V 1/10W 54.9K ohm 0603 1%", Manufacturer=Yageo, Power Rating=1/10W, Supplier Part Number 1=603-RC0603FR-0754K9L, Tolerance=1%, Voltage Rating=75V, Supplier 1=Mouser, Supplier 2=Mouser, Supplier Part Number 2=603-RC0603FR-1054K9L
R12: library part RES-0603-1K6-1/10W-1%, "Thick Film - SMD 75V 1/10W 1.6K ohm 0603 1%", Manufacturer=Yageo, Power Rating=1/10W, Supplier Part Number 1=603-RC0603FR-071K6L, Tolerance=1%, Voltage Rating=75V, Supplier 1=Mouser, Supplier 2=Mouser, Supplier 3=Mouser, Supplier Part Number 2=603-RC0603FR-101K6L, Supplier Part Number 3=603-RC0603FR-131K6L
R13: library part RES-0603-10K-1/10W-1%, "Thick Film - SMD 75V 1/10W 10K ohm 0603 1%", Manufacturer=Yageo, Power Rating=1/10W, Supplier Part Number 1=603-RC0603FR-0710KL, Tolerance=1%, Voltage Rating=75V, Supplier 1=Mouser, Supplier 2=Mouser, Supplier 3=Mouser, Supplier Part Number 2=603-RC0603FR-1010KL, Supplier Part Number 3=603-RC0603FR-1310KL
R14 R15 R16 R23 R24 R25 R26 R29 R30 R31 R32 R34 R36 R37 R38 R39 R40 R41 R42 R43 R44 R45 R46 R47 R48 R52 R53 R55: library part RES-0603-100R-1/10W-1%, "Thick Film - SMD 75V 1/10W 100 ohm 0603 1%", Manufacturer=Yageo, Power Rating=1/10W, Supplier Part Number 1=603-RC0603FR-07100RL, Tolerance=1%, Voltage Rating=75V, Supplier 1=Mouser, Supplier 2=Mouser, Supplier 3=Mouser, Supplier Part Number 2=603-RC0603FR-10100RL, Supplier Part Number 3=603-RC0603FR-13100RL
R17 R18 R19 R20 R21 R22 R27 R28 R33 R50 R54: library part RES-0603-47K-1/10W-1%, "Thick Film - SMD 75V 1/10W 47K ohm 0603 1%", Manufacturer=Yageo, Power Rating=1/10W, Supplier Part Number 1=603-RC0603FR-0747KL, Tolerance=1%, Voltage Rating=75V, Supplier 1=Mouser, Supplier 2=Mouser, Supplier 3=Mouser, Supplier Part Number 2=603-RC0603FR-1047KL, Supplier Part Number 3=603-RC0603FR-1347KL
TP1 TP2 TP3 TP4 TP5: library part TESTPOINT-SMD-1mm
U1 U2 U3: library part OPTO-TH-H11A1, "Optocoupler, Phototransistor Output, With Base Connection", Supplier Part Number 1=782-H11A1, Supplier 1=Mouser
U4: "4.5-V to 17-V Input, 1-A Synchronous Step-Down Voltage Regulator", Supplier Part Number 1=595-TPS561201DDCT, Supplier 1=Mouser, Supplier 2=Mouser, Supplier Part Number 2=595-TPS561201DDCR
U5: library part LDO-AZ1117IH-ADJ, "LDO 15V Max 1.2V Dropout 1.35A Max", Current Limit=1.35A, Dropout Voltage=1.2V, Input Voltage Maximum=15V, Minimum Load Current=1.7mA, Supplier Part Number 1=621-AZ1117IH-ADJTRG1, Supplier 1=Mouser, Vref=1.25V
U6: "Programmable Current-Limit High-Side Switch", Supplier Part Number 1=998-MIC2548A-2YM, Supplier 1=Mouser
U7: "Fixed 0.5A Current Limiting Power Distribution Switches", Current Limit=0.5A, Supplier Part Number 1=998-MIC2004-0.5YM5TR, Supplier 1=Mouser
U8: library part PIC24FJ64GA705, "Microcontrollori a 16 bit - MCU 16-bit, 16 MIPS, 64KB Flash, 16KB RAM", Supplier Part Number 1=579-24FJ64GA705IPT, Supplier 1=Mouser
U9: library part DAC-STEREO-24bit-PCM1754, "Circuiti integrati convertitori D/A audio 24-Bit 192kHz Stereo Audio DAC", Supplier Part Number 1=595-PCM1754DBQR, Supplier 1=Mouser
U10: library part OPAMP-FET-LMV358IDR-TI, "Low-Voltage Rail-to-Rail Output FET Input Dual Operational Amplifier", Manufacturer="Texas Instruments", Supplier Part Number 1=595-LMV358IDR, Supplier 1=Mouser
U11: "2x3W Stereo Differential Input Class D Audio Amplifier / with Up/Down Volume Control", Supplier Part Number 1=621-PAM8407DR, Supplier 1=Mouser
X1: library part XTAL-SMD-7.168MHz, "Crystal 7.168MHz 20ppm 30pF -10C +60C", Frequency Stability="30 ppm", Frequency Tolerance="20 ppm", Load Capacitance="30 pF", Supplier Part Number 1=449-LFXTAL017619BULK, Drive Level="500 uW", Supplier 1=Mouser
X2: library part XTAL-32.768KHz-ECS-.327-6-34B-TR, "Crystal 32.768kHz 20ppm 6pF -40C +85C", Load Capacitance="6 pF", Supplier Part Number 1=520-.327-6-34BT, Supplier 1=Mouser

## Free pads (board coordinates)
  round 0 hole 3 unplated: 3(5,5) 3(5,95) 3(95,5) 3(95,95)

## Via types
v1: diameter 0.8, hole 0.4, Top Layer to Bottom Layer, tented both sides, 190 vias
v2: diameter 0.6, hole 0.3, Top Layer to Bottom Layer, tented both sides, 27 vias
v3: diameter 1, hole 0.4, Top Layer to Bottom Layer, tented bottom, 5 vias

## Nets (pads, with @x,y where several pads share a name; then routed paths per layer and width w, separated by ;. In a path a pad name is that pad's centre, name@x,y a point inside that pad or via, vN(x,y) a via of type N, cw(c..) or ccw(c..) an arc to the next point about the centre after c; other vN are vias at no path point)
+3V3: C9.1 C10.1 J1.2 R1.2 R2.2 R3.2 R10.2 U5.2 U6.7 U7.1 | length 7.3
  Top Layer w0.6: v1(21.45,55) R3.2@22.4,55 ; v1(31.45,55) R1.2@32.4,55 ; v1(41.45,55) R2.2@42.4,55 ; v1(52,22.5) R10.2@53.196,22.5 ; v1(64.75,27.25) 64.785,27.215 U6.7@66.525,27.215 ; v1(71.784,63.093) 71.784,63.039 71.95,62.873 U7.1@71.95,61.7
  other v1: 50.25,24.25 52,24.25 49,25.5 61.75,26.5 49,27.25 61.75,28 49,29 50.5,30.25 52,30.25
"+3V3 BAT": B1.1@87.45,13 D5.1 | length 5.6
  Top Layer w0.6: B1.1@87.45,13 89.75,13 90.4,13.65 D5.1@90.4,16.05
"+3V3 PIC": C14.1 C15.2 C16.2 D5.3 R30.2 R33.2 U6.6 U6.8 U8.18 U8.30 U8.43 | length 22.1
  Top Layer w0.3: C16.2@64.6,51.75 64.724,51.626 64.724,51.026 65.25,50.5 U8.43@65.25,48.95 ; U8.18@65.25,40.55 65.25,39.25 65.75,38.75 65.75,37.4 C14.1@65.9,37.25 ; U8.30@69.7,44.5 71,44.5 72.2,43.3 C15.2@73,43.3 ; v1(87.95,55.25) R33.2@89.15,55.25
  Top Layer w0.6: C16.2@64.712,51.862 64.712,52.962 v1(64.75,53) ; v1(65.75,36) 65.788,36.038 65.788,37.138 C14.1@65.9,37.25 ; U6.8@66.525,25.945 68.641,25.945 68.696,26 v1(68.75,26) ; U6.6@66.525,28.485 68.735,28.485 v1(68.75,28.5) ; C15.2@73,43.3 73.025,43.275 74.225,43.275 v1(74.25,43.25) ; v1(86.5,34) R30.2@87.45,34 ; D5.3@91.5,18.45 v1(91.5,19.75)
"+3V3 SD": C11.1 J2.4 R17.2 R18.2 R19.2 R20.2 R21.2 R22.2 U7.5 | length 14.7
  Top Layer w0.3: v1(65,61.025) R17.2@65,62.225 ; v1(68.25,61) R18.2@68.25,62.2 ; v1(78.5,61) R19.2@78.5,62.2 ; v1(81,61) R20.2@81,62.2 ; v1(85,62.5) R22.2@85,63.7 ; v1(86.25,62.5) R21.2@86.25,63.7
  Top Layer w0.6: U7.5@74.55,61.7 74.6,61.7 74.6,64.45 C11.1@74.62,64.47 ; C11.1@74.62,64.27 C11.1@74.62,64.47 ; J2.4@74.62,67.75 C11.1@74.62,64.47 ; v1(75.75,64.5) C11.1@74.65,64.5 C11.1@74.62,64.47